# Altium PCB d21module.PcbDoc
Units mil, origin at the board's own origin, x right, y up, seen from the top; angles counter-clockwise.
Board outline 1775 x 1800 mil, 2 copper layers (Top Layer, Bottom Layer); 27 components, 60 nets, 180 pads, 93 vias.
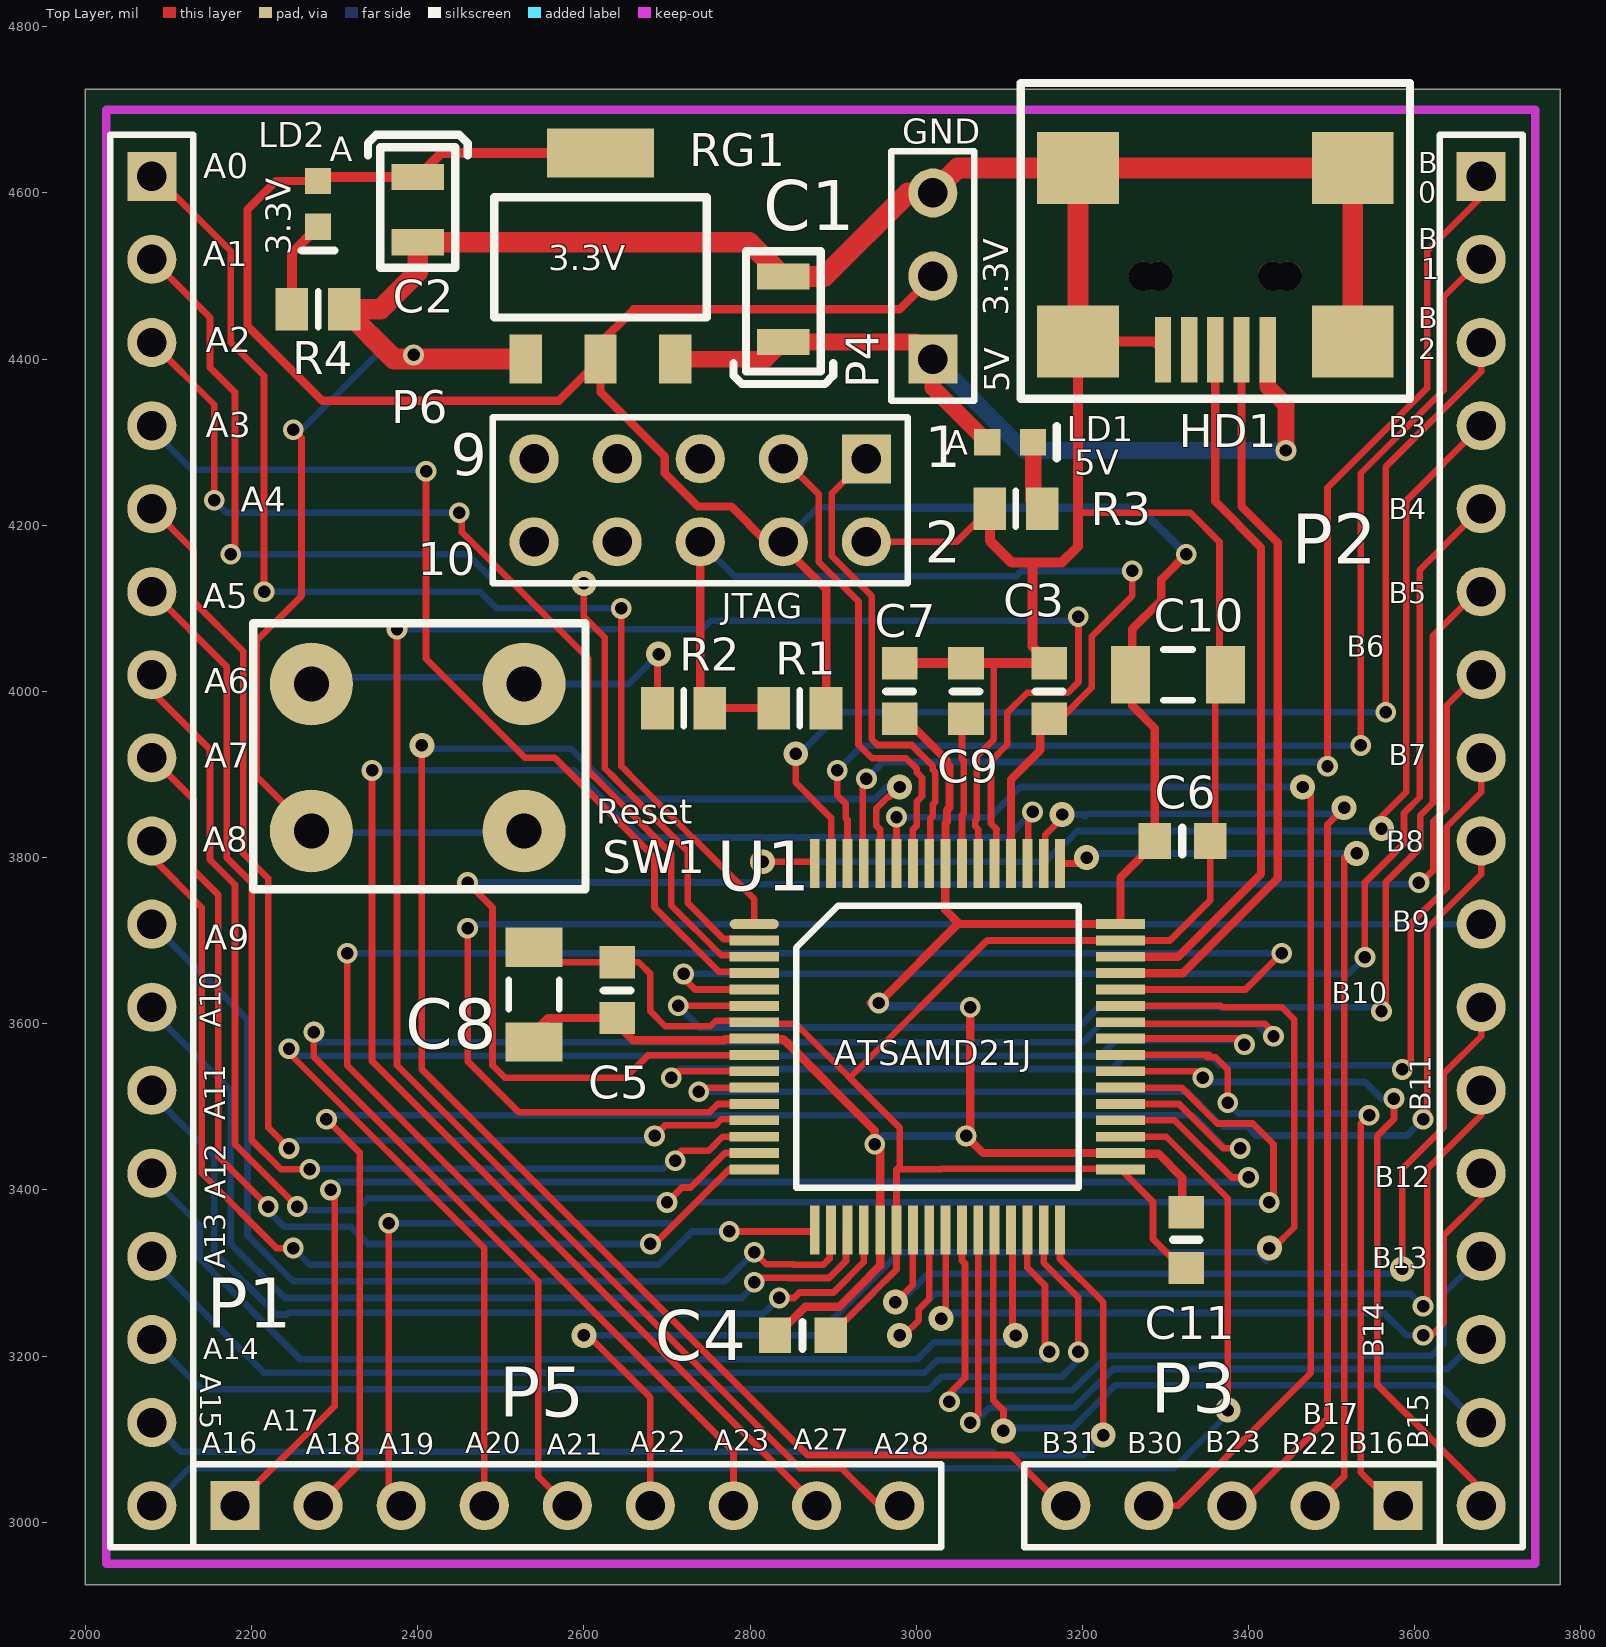
[diagram p0: Top Layer view]
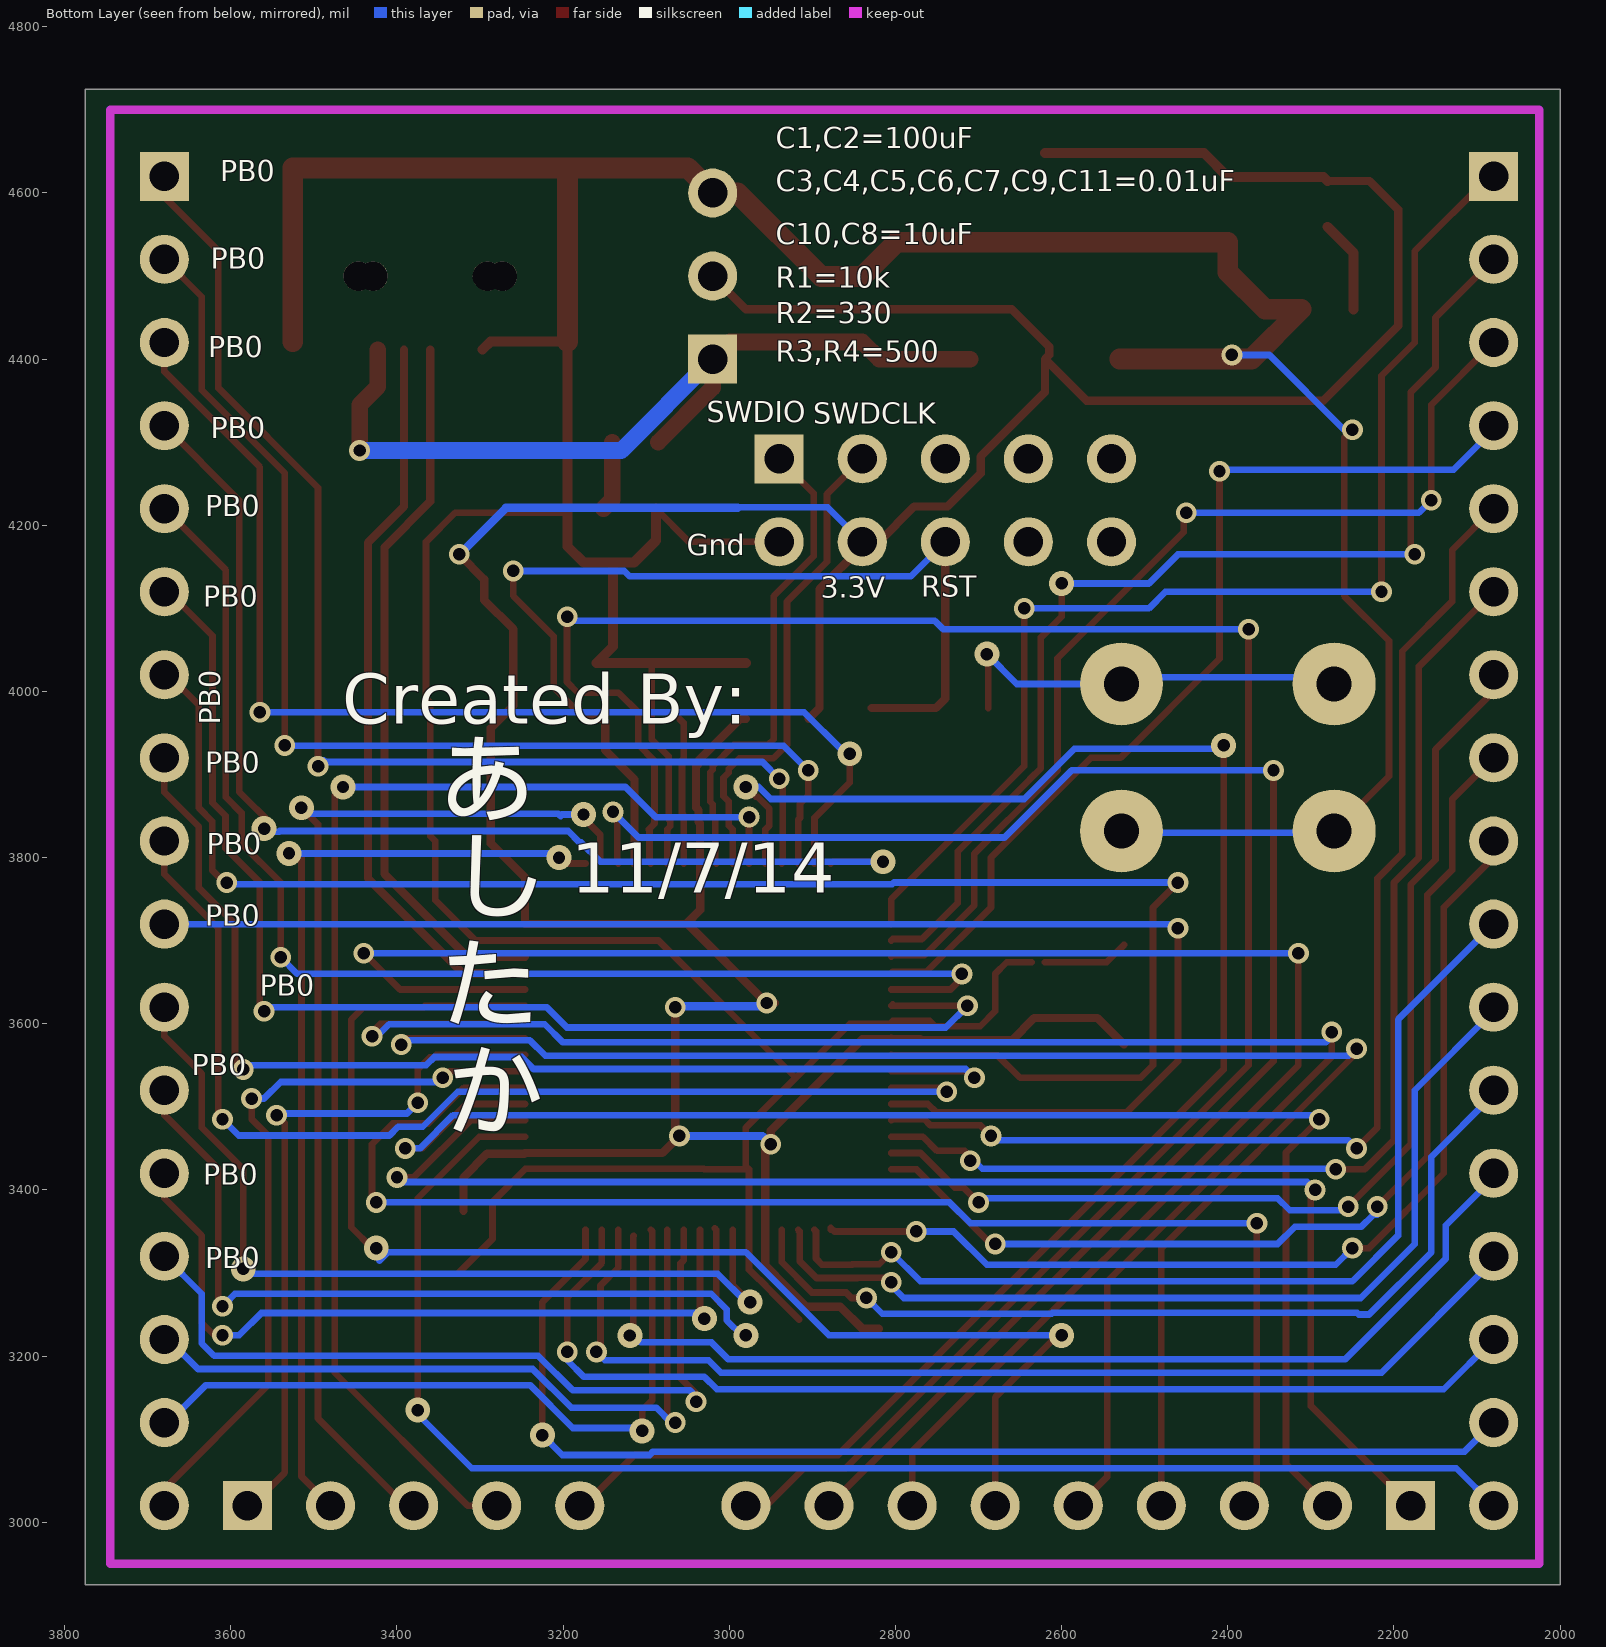
[diagram p1: Bottom Layer view, seen from below]

## Layer stack, top to bottom
Top Solder: solder mask 0.4, Solder Resist, Dk 3.5
Top Layer: signal copper 1.4
Dielectric1: dielectric 12.6, FR-4, Dk 4.8
Bottom Layer: signal copper 1.4
Bottom Solder: solder mask 0.4, Solder Resist, Dk 3.5

## Board outline
2000,2925 3775,2925 3775,4725 2000,4725

## Design rules (kind name [scope] priority, off if disabled: settings)
Clearance [All] p1: gap=8
HoleSize [All] p1: absolutevalues=TRUE maxlimit=250 minlimit=1 maxpercent=80.000 minpercent=20.000
PolygonConnect [All] p1: connectstyle=Relief reliefconductorwidth=10 reliefentries=4 polygonreliefangle="90 Angle" airgapwidth=10
RoomDefinition DevModule [InComponentClass('DevModule')] p1: confinementstyle=ConfineIn formatcopy=TRUE lockcomponents=FALSE outline 3795,3010 4540,3010 4540,3265 3795,3265
RoutingVias [All] p1: holewidth=16 width=25 viastyle="Through Hole" minholewidth=15 minwidth=25 maxholewidth=28 maxwidth=50
SilkToSilkClearance [All] p1: silktosilkclearance=1
SilkToSolderMaskClearance SilkscreenOverComponentPads [IsPad] p1: minsilkscreentomaskgap=10 clearancetoexposedcopper=TRUE
SolderMaskExpansion [All] p1: expansion=4
Width [All] p1: maxlimit=50 minlimit=8 preferedwidth=8
27 further rules are at their usual default settings.

## Components (designator, comment, footprint, x,y, rotation, side; value= is the part's Value field where it differs from the comment)
C1 "100UF_TANT_6.3V_0805" 100uF_6.3V_Tant_0805 2840,4460 r90 top
C2 "100UF_TANT_6.3V_0805" 100uF_6.3V_Tant_0805 2400,4580 r270 top
C3 "0.01UF_0603REFLOW" RC0603REFLOW-IPC 3160,4000 r90 top
C4 "0.01UF_0603REFLOW" RC0603REFLOW-IPC 2863,3225 r0 top
C5 "0.01UF_0603REFLOW" RC0603REFLOW-IPC 2640,3640 r90 top
C6 "0.01UF_0603REFLOW" RC0603REFLOW-IPC 3320,3820 r0 top
C7 "0.01UF_0603REFLOW" RC0603REFLOW-IPC 2980,4000 r90 top
C8 "10uF_Ceramic_6.3V" 1206_NP_CAP 2540,3635 r90 top
C9 "0.01UF_0603REFLOW" RC0603REFLOW-IPC 3060,4000 r90 top
C10 "10uF_Ceramic_6.3V" 1206_NP_CAP 3315,4020 r0 top
C11 "0.01UF_0603REFLOW" RC0603REFLOW-IPC 3325,3340 r270 top
HD1 "USB-MINI_B" HD_USB_MINI_B 3360,4500 r180 top locked
LD1 "0603_RED" LED0603REFLOW-IPC-COLOR 3120,4300 r90 top
LD2 "0603_RED" LED0603REFLOW-IPC-COLOR 2280,4580 r0 top
P1 "Header 17" HDR1X17 2080,4620 r270 top locked
P2 "Header 17" HDR1X17 3680,4620 r270 top locked
P3 "Header 5" HDR1X5 3580,3020 r180 top locked
P4 "Header 3" HDR1X3 3020,4400 r90 top
P5 "Header 9" HDR1X9 2180,3020 r0 top locked
P6 "Header 5X2" HDR2X5 2940,4280 r180 top
R1 "Res Semi" RESC2012L 2860,3980 r0 top
R2 "Res Semi" RESC2012L 2720,3980 r180 top
R3 "Res Semi" RESC2012L 3120,4220 r0 top
R4 "Res Semi" RESC2012L 2280,4460 r180 top
RG1 "LM1117SPX-3.3_SOT223" SOT223REFLOW 2620,4400 r0 top locked
SW1 "SW-PCB-4P-6MM" SW-PCB-4PIN 2400,3920 r0 top locked
U1 "ATSAMD21J" 64-TQFP 2805,3720 r0 top locked

## Footprints (in the part's own frame and the unit in brackets; to place one, negate y for a bottom-side part, rotate by r counter-clockwise, add the part's x,y. Pads: shape width x height; smd on the part's side, far side on the other; paste and mask are expansions set on the pad)
64-TQFP [mm]
  oval 1.5x0.3 smd: 1(0,0)
  rect 1.5x0.3 smd: 2(0,-0.5) 3(0,-1) 4(0,-1.5) 5(0,-2) 6(0,-2.5) 7(0,-3) 8(0,-3.5) 9(0,-4) 10(0,-4.5) 11(0,-5) 12(0,-5.5) 13(0,-6) 14(0,-6.5) 15(0,-7) 16(0,-7.5) 33(11.2,-7.5) 34(11.2,-7) 35(11.2,-6.5) 36(11.2,-6) 37(11.2,-5.5) 38(11.2,-5) 39(11.2,-4.5) 40(11.2,-4) 41(11.2,-3.5) 42(11.2,-3) 43(11.2,-2.5) 44(11.2,-2) 45(11.2,-1.5) 46(11.2,-1) 47(11.2,-0.5) 48(11.2,0)
  rect 0.3x1.5 smd: 17(1.85,-9.35) 18(2.35,-9.35) 19(2.85,-9.35) 20(3.35,-9.35) 21(3.85,-9.35) 22(4.35,-9.35) 23(4.85,-9.35) 24(5.35,-9.35) 25(5.85,-9.35) 26(6.35,-9.35) 27(6.85,-9.35) 28(7.35,-9.35) 29(7.85,-9.35) 30(8.35,-9.35) 31(8.85,-9.35) 32(9.35,-9.35) 49(9.35,1.85) 50(8.85,1.85) 51(8.35,1.85) 52(7.85,1.85) 53(7.35,1.85) 54(6.85,1.85) 55(6.35,1.85) 56(5.85,1.85) 57(5.35,1.85) 58(4.85,1.85) 59(4.35,1.85) 60(3.85,1.85) 61(3.35,1.85) 62(2.85,1.85) 63(2.35,1.85) 64(1.85,1.85)
  silkscreen extent 1.28,-8.06 9.91,0.57
100uF_6.3V_Tant_0805 [mm] "100uF 6.3V Tantalum 0805 package"
  rect 0.8x1.6 smd: 1(-1,0) 2(1,0)
  silkscreen extent -2.29,-1.52 1.78,1.52
1206_NP_CAP [mm] "Chip Capacitor, 2-Leads, Body 3.2x1.6mm, IPC Medium Density"
  rect 1.2x1.75 smd: 1(-1.45,0) 2(1.45,0)
  silkscreen extent -0.45,-0.77 0.45,0.77, body extent -1.6,-0.8 1.6,0.8, height 1.25
HD_USB_MINI_B [mm]
  rect 0.5x2 smd: 1(-1.6,2.25) 2(-0.8,2.25) 3(0,2.25) 4(0.8,2.25) 5(1.6,2.25)
  rect 2.5x2.2 smd: 6(-4.2,2) 7(4.2,2) 8(-4.2,-3.3) 9(4.2,-3.3)
  round 0.9 hole 0.9 unplated: 10(-1.75,0) 11(-2.2,0) 12(1.75,0) 13(2.2,0)
  Top Layer pour cut-out: -1.75,-0.45 -3.85,-0.45 -3.85,-6.5 3.85,-6.5 3.85,-0.45 1.75,-0.45 1.75,1.2 -1.75,1.2
  silkscreen extent -5.95,-5.9 5.95,3.75, body extent -5.35,-6.5 5.35,2.7, height 3.95
HDR1X3 [mm] "Connector; Header; 3 Position"
  rect 1.5x1.5 hole 0.9: 1(0,0)
  round 1.5 hole 0.9: 2(2.54,0) 3(5.08,0)
  silkscreen extent -1.27,-1.27 6.35,1.27
HDR1X5 [mm] "Connector; Header; 5 Position"
  rect 1.5x1.5 hole 0.9: 1(0,0)
  round 1.5 hole 0.9: 2(2.54,0) 3(5.08,0) 4(7.62,0) 5(10.16,0)
  silkscreen extent -1.27,-1.27 11.43,1.27
HDR1X9 [mm] "Connector; Header; 9 Position"
  rect 1.5x1.5 hole 0.9: 1(0,0)
  round 1.5 hole 0.9: 2(2.54,0) 3(5.08,0) 4(7.62,0) 5(10.16,0) 6(12.7,0) 7(15.24,0) 8(17.78,0) 9(20.32,0)
  silkscreen extent -1.27,-1.27 21.59,1.27
HDR1X17 [mm] "Connector; Header; 17 Position"
  rect 1.5x1.5 hole 0.9: 1(0,0)
  round 1.5 hole 0.9: 2(2.54,0) 3(5.08,0) 4(7.62,0) 5(10.16,0) 6(12.7,0) 7(15.24,0) 8(17.78,0) 9(20.32,0) 10(22.86,0) 11(25.4,0) 12(27.94,0) 13(30.48,0) 14(33.02,0) 15(35.56,0) 16(38.1,0) 17(40.64,0)
  silkscreen extent -1.27,-1.27 41.91,1.27
HDR2X5 [mm] "Connector; Header; 5x2 Position"
  rect 1.5x1.5 hole 0.9: 1(0,0)
  round 1.5 hole 0.9: 2(0,2.54) 3(2.54,0) 4(2.54,2.54) 5(5.08,0) 6(5.08,2.54) 7(7.62,0) 8(7.62,2.54) 9(10.16,0) 10(10.16,2.54)
  silkscreen extent -1.27,-1.27 11.43,3.81
LED0603REFLOW-IPC-COLOR [mm]
  rect 0.8x0.8 smd: 1(0,-0.525) 2(0,0.875)
  silkscreen extent -0.5,-1.25 0.5,-1.25
RC0603REFLOW-IPC [mil]
  rect 39x43 smd: 1(-33,0) 2(34,0)
  silkscreen extent 0,-16 0,16
RESC2012L [mm] "Chip Resistor, Body 2.0x1.3mm, IPC High Density"
  rect 1x1.3 smd: 1(-0.8,0) 2(0.8,0)
  silkscreen extent 0,-0.55 0,0.55, body extent -1.07,-0.7 1.07,0.7, height 2.54
SOT223REFLOW [mil]
  rect 39x59 smd: 1(-90,0) 2(0,0) 3(90,0)
  rect 129x59 smd: 4(0,248)
  silkscreen extent -128,50 128,195
SW-PCB-4PIN [mil]
  round 100 hole 42: 1(-128,-88) 2(128,-88) 3(128,89) 4(-128,89)
  silkscreen extent -198,-158 202,162

## Part data
C1 C2 C3 C4 C5 C6 C7 C9 C11: "Capacitor"
C8 C10: library part 18834, "Capacitor, 10uF, 6.3V, Ceramic, Y5V, -20%, +80%, Non-Polar, 1206, MURATA: GRM31MF50J106ZA01L or equivalent"
HD1: "Header"
LD1 LD2: "LED"
P1 P2: "Header, 17-Pin"
P3: "Header, 5-Pin"
P4: "Header, 3-Pin"
P5: "Header, 9-Pin"
P6: "Header, 5-Pin, Dual row"
R1 R2 R3 R4: "Semiconductor Resistor"
RG1: "Regulator"
SW1: "Switch"

## Via types
v1: diameter 25, hole 15, Top Layer to Bottom Layer, 71 vias
v2: diameter 30, hole 15, Top Layer to Bottom Layer, 22 vias

## Nets (pads, with @x,y where several pads share a name; then routed paths per layer and width w, separated by ;. In a path a pad name is that pad's centre, name@x,y a point inside that pad or via, vN(x,y) a via of type N, cw(c..) or ccw(c..) an arc to the next point about the centre after c; other vN are vias at no path point)
+3.3: C2.1 C4.1 C5.1 C6.1 C7.1 C8.1 C10.1 C11.1 LD2.2 P4.2 P6.4 R1.2 RG1.2 RG1.4 U1.8 U1.21 U1.34 U1.48 U1.56 | length 5284.4
  Top Layer w10: LD2.2 2229.45,4614.45 2195,4580 2195,4440 2285,4350 2570,4350 RG1.2 ; C8.1@2525,3575 2557,3607 2633,3607 2659.93,3580.07 2730.61,3580.07 2730.69,3580 2768.66,3580 2770.09,3581.43 2804.22,3581.43 U1.8 2805.78,3581.43 2839.91,3581.43 2950,3471.34 2950,3465 v1@2945,3460 ; C4.1@2820,3233 2840,3233 2866.5,3259.5 2907.62,3259.5 2931,3282.88 2931,3283.23 2956.57,3308.8 U1.21 v1@2956.57,3450 ; R1.2@2904.5,3967 R1.2 2891.5,4123.11 2840,4174.6 P6.4 2820,4180 2777.47,4222.53 2737.33,4222.53 2697.47,4262.38 2697.47,4282.67 2620,4360.14 RG1.2 ; v1@2945,3625 v1(2955,3625) 3050.98,3720.98 ; C7.1 2986.99,3967 3037,3916.99 3037,3912.85 3040,3909.85 3040,3860.15 3037,3857.15 3037,3843.01 3035.31,3841.32 U1.56 3035,3792.52 3035,3736.97 3050.98,3720.98 ; P4.2 2980,4460 2660,4460 2615,4415 2615,4405 RG1.2 ; v1(3065,3620) 3065,3470 v1(3060,3465) 3080.59,3444.41 U1.34 3246.72,3443.63 3291.37,3443.63 3320,3415 C11.1@3320,3375 ; v1(3325,4165) 3295,4135 3295,4110 3260,4075 3260,3982.91 3287,3955.91 3287,3817 3245.94,3775.94 U1.48 3051.97,3720 3050.98,3720.98
  Top Layer w12: LD2.2 2284.92,4619.37 C2.1 2428.63,4648 RG1.4
  Bottom Layer w8: P6.4 2881.53,4221.53 2989.47,4221.53 2990,4221
  Bottom Layer w10: v1(2950,3455) 2960,3465 v1(3060,3465) ; v1@2964,3621 3066,3621 v1(3065,3620) ; 2990,4221 3269,4221 v1(3325,4165)
+5: C1.1 HD1.1 LD1.2 P4.1 RG1.3 | length 1055.3
  Top Layer w20: RG1.3 2819.37,4400 C1.1 2999.37,4420.63 P4.1 3020,4365.55 LD1.2 ; HD1.1 3422.99,4367.01 3445,4345 v1(3445,4290)
  Bottom Layer w20: P4.1 3130,4290 v1(3445,4290)
D+: HD1.3 U1.46 | length 864.1
  Top Layer w10: U1.46 3315.17,3680.63 3415,3780.46 3415,4173.54 3360,4228.54 HD1.3
D-: HD1.2 U1.45 | length 890.7
  Top Layer w10: U1.45 3320.95,3660.95 3435,3775 3435,4179 3391.5,4222.5 HD1.2
GND: C1.2 C2.2 C3.2 C4.2 C5.2 C6.2 C7.2 C8.2 C9.2 C10.2 C11.2 HD1.5 HD1.6 HD1.7 HD1.8 HD1.9 P4.3 P6.2 R3.1 R4.1 RG1.1 SW1.1 SW1.2 U1.7 U1.22 U1.33 U1.47 U1.54 | length 6608.4
  Top Layer w8: v1@2252,4313 2260,4305 2260,4115 2206,4061 2206,3898 SW1.1 ; C8.2@2525,3695 2546,3674 C5.2@2620,3674 ; C5.2@2636,3674 2666,3674 2680,3660 2680,3615 2697.93,3597.07 2752.07,3597.07 2758.67,3603.67 2803.22,3603.67 U1.7 2806.78,3600.11 2854.89,3600.11 2980,3475 2980,3428.19 2976.53,3424.72 3030.18,3424.72 3030.87,3425.42 3245.25,3425.42 3285,3385.67 3285,3341 C11.2@3326,3300 ; C4.2@2916.16,3244 2948,3275.84 2948,3276.18 2963.82,3292 2964.16,3292 2976.26,3304.1 U1.22 2976.26,3425 ; 2920,3535 3085.32,3700.32 U1.47 3305.32,3700.32 3354,3749 C6.2 3360,3826 3360,3987.09 3365,3992.09 3365,4180 3330,4215 3194.65,4215 ; P6.2 3048.5,4180 R3.1 ; U1.54 3074.68,3834.02 3071,3837.71 3071,3844.48 3073,3846.48 3073,3922.03 3093.5,3942.53 3093.5,4032.5 3095,4034
  Top Layer w12: C7.2 C9.2 3095,4034 C3.2 3140,4054 3140,4155 ; R3.1 3088.5,4181.5 3115,4155 3140,4155 ; HD1.5 3287.17,4421.26 HD1.7 3194.65,4215 3194.65,4174.65 3175,4155 3140,4155
  Top Layer w25: RG1.1 2371.5,4400 R4.1 2355,4460 2400,4505 C2.2 2798.74,4540.63 C1.2 2889.37,4499.37 2990,4600 P4.3 3049.92,4629.92 HD1.9 ; HD1.7 HD1.9 ; HD1.6 HD1.8 HD1.9
  Bottom Layer w8: v1(2250,4315) 2260,4315 2350,4405 v1(2395,4405) ; SW1.1 2274,3830 2526,3830 SW1.2
NetC9_1: C9.1 U1.55 | length 177.9
  Top Layer w8: U1.55 3055,3836.96 3055,3851.11 3057,3853.11 3057,3916.89 3055,3918.89 3055,3962 C9.1
NetLD1_1: LD1.1 R3.2 | length 84.5
  Top Layer w20: LD1.1 3140.67,4230.83 R3.2
NetLD2_1: LD2.1 R4.2 | length 112.4
  Top Layer w12: R4.2 2248.5,4527.83 LD2.1
NetP1_1: P1.1 U1.1 | length 1438.4
  Top Layer w8: P1.1 2085,4620 2175,4530 2175,4420 2215,4380 v1(2215,4120) ; v1@2645,4095 2645,3910.25 2654,3901.25 2654,3901 2805,3750 U1.1
  Bottom Layer w8: v1(2215,4120) 2475,4120 2495,4100 v1(2645,4100)
NetP1_2: P1.2 U1.2 | length 1368.1
  Top Layer w8: P1.2 2150,4450 2150,4390 2180,4360 2180,4170 v1(2175,4165) ; v2(2600,4130) 2600,4090 2625,4065 2625,3907.63 2638,3894.63 2638,3894.37 2725,3807.37 2725,3745.25 2768.16,3702.09 2803.22,3702.09 U1.2
  Bottom Layer w8: v1(2175,4165) 2460,4165 2495,4130 v2@2595,4130
NetP1_3: P1.3 U1.3 | length 1226.5
  Top Layer w8: P1.3 2155,4345 v1(2155,4230) ; v1(2450,4215) 2451,4215 2453,4213 2453,4192 2605,4040 2605,3905 2622,3888 2622,3887.75 2705,3804.75 2705,3742.63 2765.22,3682.41 2803.22,3682.41 U1.3
  Bottom Layer w8: v1(2155,4230) 2170,4215 v1(2450,4215)
NetP1_4: P1.4 U1.4 | length 1168.3
  Top Layer w8: v1(2410,4265) 2410,4039.32 2529.32,3920 2565,3920 2685,3800 2685,3740 2762.28,3662.72 2803.22,3662.72 U1.4
  Bottom Layer w8: P1.4 2080,4315 2128,4267 2408,4267 v1(2410,4265)
NetP1_5: P1.5 U1.13 | length 1414.1
  Top Layer w8: P1.5 2130,4170 2130,4108.3 2190,4048.3 2190,3805 2220,3775 2220,3475 v1(2245,3450) ; v1@2688,3463 2688,3468 2697.65,3477.65 2757.9,3477.65 2765.25,3485 2803.78,3485 U1.13
  Bottom Layer w8: v1(2245,3450) 2255,3460 2680,3460 v1(2685,3465)
NetP1_6: P1.6 U1.14 | length 1355.4
  Top Layer w8: P1.6 2170,4030 2170,3800 2200,3770 2200,3460 2235,3425 v1(2270,3425) ; v1(2710,3435) 2710,3440 2717,3447 2749.88,3447 2766.98,3464.09 U1.14
  Bottom Layer w8: v1(2270,3425) 2270.5,3425.5 2695.5,3425.5 2710,3440 v1(2710,3435)
NetP1_7: P1.7 U1.15 | length 1312
  Top Layer w8: P1.7@2085,4020 P1.7 2080,4000 2150,3930 2150,3797.37 2180,3767.37 2180,3455 v1(2255,3380) ; v1(2700,3385) 2718,3403 2728.51,3403 2769.92,3444.41 U1.15
  Bottom Layer w8: P1.7@2080,4010 P1.7 ; v1(2255,3380) 2259.5,3375.5 2325.5,3375.5 2340,3390 2695,3390 v1(2700,3385)
NetP1_8: P1.8 U1.16 | length 1234.7
  Top Layer w8: P1.8 2130,3870 2130,3785 2160,3755 2160,3440 v1(2220,3380) ; v1@2685,3335 2774.72,3424.72 U1.16
  Bottom Layer w8: P1.8 P1.8@2085,3920 ; v1@2220,3370 2225,3370 2239.5,3355.5 2319.5,3355.5 2340,3335 v1(2680,3335)
NetP1_9: P1.9 U1.17 | length 1234.3
  Top Layer w8: P1.9 2080,3800 2140,3740 2140,3420 2230,3330 v1(2250,3330) ; v1(2775,3350) 2873.34,3350 2877.83,3354.49 U1.17
  Bottom Layer w8: P1.9 P1.9@2085,3820 ; v1(2250,3330) 2270,3310 2690,3310 2730,3350 v1(2775,3350)
NetP1_10: P1.10 U1.18 | length 1221.3
  Top Layer w8: P1.10 P1.10@2092.58,3720 ; v1@2802.5,3327.5 2819.5,3310.5 2851.78,3310.5 2852.28,3310 2888.35,3310 2895.74,3317.39 2895.74,3350.11 U1.18
  Bottom Layer w8: P1.10 2195,3605 2195,3345 2250,3290 2770,3290 v1(2805,3325)
NetP1_11: P1.11 U1.19 | length 1151.5
  Top Layer w8: v1(2805,3289) 2811,3295 2812.37,3295 2812.87,3294.5 2845.15,3294.5 2845.65,3294 2894.98,3294 2915.43,3314.45 2915.43,3350.11 U1.19
  Bottom Layer w8: P1.11 2080,3615 2175,3520 2175,3335 2240,3270 2790,3270 2805,3285 v1(2805,3289)
NetP1_12: P1.12 U1.20 | length 1104.9
  Top Layer w8: v1(2835,3270) 2852.96,3270 2859.46,3276.5 2900.58,3276.5 2902.08,3278 2902.08,3278.35 2936.89,3313.16 U1.20
  Bottom Layer w8: P1.12 2080,3515 2155,3440 2155,3325 2230,3250 2242.37,3250 2244.37,3252 2611.18,3252 2612.18,3251 2816,3251 v1(2835,3270)
NetP1_13: P1.13 U1.29 | length 1300.1
  Top Layer w8: U1.29@3115,3345 3115.83,3344.17 3115.83,3228.55 v2(3119.59,3224.79)
  Bottom Layer w8: P1.13 2087,3413 2087,3408 2137.53,3357.47 2137.53,3317.47 2259,3196 3001,3196 3021.5,3216.5 3106.5,3216.5 3114.5,3224.5 3114.5,3225 3119.59,3219.91 v2(3119.59,3224.79)
NetP1_14: P1.14 U1.30 | length 1309
  Top Layer w8: U1.30 3133.74,3306.26 3155,3285 3155,3210 v1(3160,3205)
  Bottom Layer w8: P1.14 2080,3315 2215,3180 3010,3180 3025,3195 3150,3195 v1(3160,3205)
NetP1_15: P1.15 U1.31 | length 1328.5
  Top Layer w8: U1.31 3153.42,3312.14 3195,3270.57 v1(3195,3205)
  Bottom Layer w8: P1.15 2140,3160 3015,3160 3030,3175 3175,3175 3195,3195 v1(3195,3205)
NetP1_16: P1.16 U1.32 | length 1439.5
  Top Layer w8: U1.32 3173.11,3316.89 3225,3265 v2(3225,3105)
  Bottom Layer w8: P1.16 2115,3085 3091.82,3085 3095.82,3081 3201,3081 v2(3225,3105)
NetP1_17: P1.17 U1.35 | length 1785.3
  Top Layer w8: P1.17 P1.17@2080,3045 ; U1.35 3300.91,3464.09 3375,3390 v2(3375,3135)
  Bottom Layer w8: P1.17 2125,3065 3310,3065 3375,3130 v2(3375,3135)
NetP2_1: P2.1 U1.61 | length 1448.1
  Top Layer w8: U1.61 2935.76,3793.96 2935.76,3890.76 v1(2940,3895) ; v1(3495,3910) 3495,4245.25 3615,4365.25 3615,4530 3680,4595 P2.1
  Bottom Layer w8: v1(2940,3895) 2960,3915 3486,3915 v1@3488,3917
NetP2_2: P2.2 U1.62 | length 1404.7
  Top Layer w8: v1(2905,3905) 2905,3875 2915,3865 2915,3847.67 2917.2,3845.46 U1.62 ; v1(3535,3935) 3535,4262.63 3635,4362.63 3635,4475 P2.2
  Bottom Layer w8: v1(2905,3905) 2934.5,3934.5 3534.5,3934.5 v1(3535,3935)
NetP2_3: P2.3 U1.63 | length 1385.2
  Top Layer w8: v2(2855,3925) 2855,3890.35 2897.52,3847.83 U1.63 ; v1@3570,3975 3565,3980 3565,4270 3680,4385 P2.3
  Bottom Layer w8: v2(2855,3925) 2850,3930 2865,3930 2910,3975 v1(3565,3975)
NetP2_4: P2.4 U1.64 | length 1378.9
  Top Layer w8: v2(2815,3795) 2875.67,3795 U1.64 ; v2(3560,3835) 3560,3830.76 3559.24,3830 3550,3839.24 3590,3879.24 3590,4230 P2.4
  Bottom Layer w8: v2(2815,3795) 3155,3795 3178.36,3818.36 3180.18,3818.36 3193.82,3832 3541.18,3832 3541.95,3831.23 3556.23,3831.23 v2(3560,3835)
NetP2_5: P2.5 U1.5 | length 1547.4
  Top Layer w8: v1(2720,3660) 2720,3655 2733.74,3641.26 U1.5 ; v1(3540,3680) 3540,3770 3587,3817 3587,3853.61 3606,3872.61 3606,4146 P2.5
  Bottom Layer w8: v1(2720,3660) 3520,3660 v1(3540,3680) ; P2.5@3662,4238 P2.5
NetP2_6: P2.6 U1.6 | length 1519.3
  Top Layer w8: v1(2713.43,3621.57) U1.6 U1.6@2803.22,3623.35 ; v1@3565,3615 3565,3770 3606.47,3811.47 3606.47,3850.46 3622,3865.98 3622,4067 3675,4120 P2.6
  Bottom Layer w8: v1(2713.43,3621.57) 2739.5,3595.5 3195.5,3595.5 3220,3620 3555,3620 v1(3560,3615)
NetP2_7: P2.7 U1.9 | length 2008.2
  Top Layer w8: v1(2460,3770) 2490,3740 2490,3550 2505,3535 2650,3535 2677,3562 2804.48,3562 U1.9 ; v1(3605,3770) 3610,3770 3608.74,3771.26 3622.47,3785 3622.47,3843.83 3638.47,3859.83 3638.47,3983.47 3675,4020 P2.7
  Bottom Layer w8: v1(2460,3770) 2466,3764 2466,3770 2801.82,3770 2803.82,3768 3603,3768 v1(3605,3770)
NetP2_8: P2.8 U1.10 | length 1408.8
  Top Layer w8: v1@2707.16,3542.84 U1.10 ; v1(3585,3545) 3595,3555 3595,3720 3638.47,3763.47 3638.47,3837.2 3680,3878.73 P2.8
  Bottom Layer w8: v1(2705,3535) 2715.62,3545.62 3235.62,3545.62 3250,3560 3355,3560 3365,3550 3580,3550 v1(3585,3545)
NetP2_9: P2.9 U1.11 | length 1337.6
  Top Layer w8: v1(2738.15,3518.15) 2738.15,3523.15 U1.11 ; v1(3610,3485) 3615,3490 3615,3715 3680,3780 P2.9
  Bottom Layer w8: v1(2738.15,3518.15) 3326.85,3518.15 3369,3476 3398.65,3476 3409.15,3465.5 3590.5,3465.5 v1(3610,3485)
NetP2_10: P2.10 U1.12 | length 1754.5
  Top Layer w8: v1(2460,3715) 2460,3555 2521.35,3493.65 2751.28,3493.65 2761.09,3503.47 U1.12
  Bottom Layer w8: v1@2460,3720 P2.10
NetP2_11: P2.11 U1.23 | length 1093.5
  Top Layer w8: v2(2975,3265) 2995.94,3285.94 U1.23 ; v2@3590,3295 3585,3300 3585,3425 3635,3475 3635,3540 3680,3585 P2.11
  Bottom Layer w8: v2(2975,3265) 2980,3265 3014,3299 3586,3299 3585,3300 v2(3585,3305)
NetP2_12: P2.12 U1.24 | length 1102.8
  Top Layer w8: v2(2980,3225) 2985,3225 3003,3243 3003,3256.18 3015.63,3268.81 U1.24 U1.24@3017.41,3353.67 ; v1@3615,3264 3615,3425 3680,3490 P2.12
  Bottom Layer w8: v2(2980,3225) 2985,3225 3003,3243 3003,3256.18 3021.82,3275 3595,3275 3605.91,3264.09 3605.91,3255.91 v1(3610,3260)
NetP2_13: P2.13 U1.25 | length 956.9
  Top Layer w8: v2(3030,3245) 3030,3240.63 3035.31,3235.31 U1.25 ; v1@3610,3220.35 v1(3610,3225) 3620,3225 3635,3240 3635,3345 3680,3390 P2.13
  Bottom Layer w8: v2(3030,3245) 3036.79,3251.79 3563.21,3251.79 3590,3225 v1(3610,3225)
NetP2_14: P2.14 U1.26 | length 958.9
  Top Layer w8: v1@3038.75,3153.75 3058.68,3173.68 3058.68,3311.57 3055,3315.25 U1.26
  Bottom Layer w8: v1(3040,3145) 3040,3151 3048,3159 3188.65,3159 3230.15,3200.5 3620.15,3200.5 3635,3215.35 3635,3275 P2.14
NetP2_15: P2.15 U1.27 | length 892.3
  Top Layer w8: v1(3065,3120) 3074.68,3129.68 U1.27
  Bottom Layer w8: v1(3065,3120) 3070,3120 3088,3138 3190.28,3138 3236.78,3184.5 3639.5,3184.5 3675,3220 P2.15
NetP2_16: P2.16 U1.28 | length 858.7
  Top Layer w8: U1.28 3092.59,3350.11 3092.59,3235.77 3092.59,3147.06 3105,3134.65 v2(3105,3110)
  Bottom Layer w8: v2@3109,3113.5 3188.4,3113.5 3239.9,3165 3630,3165 3675,3120 P2.16
NetP2_17: P2.17 U1.39 | length 881.6
  Top Layer w8: U1.39 v1@3337.16,3542.84 ; v1(3575,3510) 3575,3485.35 3555,3465.35 3555,3165 3680,3040 P2.17
  Bottom Layer w8: v1(3345,3535) 3350,3530 3540,3530 3560,3510 v1(3575,3510)
NetP5_1: P5.1 U1.36 | length 1725.5
  Top Layer w8: P5.1 2300,3140 2300,3395 v1(2295,3400) ; U1.36 3311.22,3483.78 3380,3415 v1(3400,3415)
  Bottom Layer w8: v1(2295,3400) 2304.5,3409.5 3394.5,3409.5 v1(3400,3415)
NetP5_2: P5.2 U1.37 | length 1790
  Top Layer w8: P5.2 2330,3070 2330,3445 v1(2290,3485) ; U1.37 3316.28,3503.47 3369.75,3450 v1(3390,3450)
  Bottom Layer w8: v1(2290,3485) 2290,3490 3332.37,3490 3372.37,3450 v1(3390,3450)
NetP5_3: P5.3 U1.38 | length 1700.9
  Top Layer w8: v1(2365,3360) 2365,3035 P5.3 ; U1.38 3319.22,3523.15 3362.37,3480 3405,3480 3430,3455 3430,3390 v1(3425,3385)
  Bottom Layer w8: v1(2365,3360) 2710,3360 2735,3385 v1(3425,3385)
NetP5_4: P5.4 U1.41 | length 1967.5
  Top Layer w8: v1@2246,3569 2246,3564 2480,3330 P5.4 ; U1.41@3246.15,3582 U1.41 3387.8,3582.2 v1(3395,3575)
  Bottom Layer w8: v1@2241.02,3575 2254.4,3561.62 3221.62,3561.62 3240,3580 3390,3580 v1(3395,3575)
  other v1: 2245,3570
NetP5_5: P5.5 U1.42 | length 2044.2
  Top Layer w8: v1(2275,3590) 2275,3585 2275,3560 2545,3290 2545,3055 P5.5 ; U1.42 U1.42@3247.05,3603 ; U1.42@3265,3600.11 3419.89,3600.11 3430,3590 v1(3430,3585)
  Bottom Layer w8: v1(2275,3590) 2275,3585 2282.38,3577.62 3200.25,3577.62 3222.13,3599.5 3409.5,3599.5 v1@3424,3585
NetP5_6: P5.6 U1.43 | length 1616
  Top Layer w8: v2(2600,3225) 2602.5,3227.5 2680,3150 P5.6 ; U1.43 3366.57,3621.57 3368.15,3620 3440,3620 3455,3605 3455,3355 3430,3330 v2(3425,3330)
  Bottom Layer w8: v2(2600,3225) 2880,3225 2980,3325 3411,3325 3421,3315
NetP5_7: P5.7 U1.44 | length 2232.4
  Top Layer w8: v1(2315,3685) 2315,3550 2780,3085 2780,3036.94 2763.06,3020 P5.7 ; U1.44 3396.26,3641.26 3435,3680 3440,3680 v1(3440,3685)
  Bottom Layer w8: v1(2315,3685) 3431,3685 3439,3677 3440,3678 v1(3440,3685)
NetR2_2: R2.2 SW1.3 SW1.4 | length 504.5
  Top Layer w8: R2.2 v2@2688.5,4045
  Bottom Layer w8: SW1.4 2280,4017 2520,4017 SW1.3 2654,4009 v2(2690,4045)
NRESET: C3.1 P6.6 R1.1 R2.1 U1.52 | length 1246.9
  Top Layer w8: C3.1 3173.6,3967 3211.29,4004.69 3211.29,4066.29 3260,4115 v1(3260,4145)
  Top Layer w10: P6.6 2740,3991.5 R2.1 R1.1 ; U1.52 3114.05,3894.05 3149.44,3929.44 3149.44,3964.44 3152,3967 C3.1
  Bottom Layer w8: P6.6 2781.53,4138.47 3119.89,4138.47 3126.42,4145 v1(3260,4145)
PA27: P5.8 U1.51 | length 2012.6
  Top Layer w8: v1(2345,3905) 2340,3905 2345,3900 2345,3555 P5.8 ; U1.51 3135,3794.09 v1@3135,3845 ; v1(3140,3855) v1@3140,3860
  Bottom Layer w8: v1(2345,3905) 2587.94,3905 2668.7,3824.24 3109.24,3824.24 v1(3140,3855)
PA28: P5.9 U1.53 | length 2554.1
  Top Layer w8: v1(2375,4075) 2375,3550 2860,3065 2910,3065 2955,3020 P5.9 ; U1.53 3096.15,3794.61 3096.15,3832.86 ; 3097.05,3833.76 3090.68,3840.13 3090.68,3840.65 3090,3841.33 3090,3916.4 3109.5,3935.9 ; 3109.5,3942.53 3109.5,3935.9 ; v1@3195.29,4086.01 3195.29,4011.32 3182.47,3998.5 3133.53,3998.5 3109.5,3974.47 3109.5,3935.9
  Bottom Layer w8: v1(2375,4075) 2742.63,4075 2752.63,4085 3190,4085 v1@3197.5,4092.5
  other v1: 3195,4090
PB17: P3.1 U1.40 | length 849.7
  Top Layer w8: U1.40 3352.48,3562.52 ; 3350,3560 3350.5,3559.5 3360.5,3559.5 3375,3545 v1(3375,3505) ; v1(3545,3490) 3535,3480 3535,3060 3575,3020 P3.1
  Bottom Layer w8: v1(3375,3505) 3388,3492 3543,3492 v1(3545,3490)
PB22: P3.2 U1.49 | length 1184.6
  Top Layer w8: U1.49 3192.83,3792.83 3200,3800 v2(3205,3800) ; P3.2 3515,3055 3515,3800 3518.81,3803.81 3522.63,3800 3527.63,3805 v2(3530,3805)
  Bottom Layer w8: v2@3200,3805 v2@3525,3805 ; v2(3205,3800) v2@3205,3810
PB23: P3.3 U1.50 | length 1313.8
  Top Layer w8: U1.50@3155,3795 3155.2,3795.2 3155.2,3827.33 3177.87,3850 3176,3851.87 v2(3175.5,3851.87) ; P3.3 3390,3020 3495,3125 3495,3840 v2(3515,3860)
  Bottom Layer w8: v2(3175.5,3851.87) 3201.23,3851.87 3203.1,3850 3206.1,3853 3508,3853 v2(3515,3860)
PB30: P3.4 U1.59 | length 1530.1
  Top Layer w8: U1.59 v1(2976.26,3848.74) ; P3.4 3315,3020 3475,3180 3475,3875 v2(3465,3885)
  Bottom Layer w8: v1(2976.26,3848.74) 3088.74,3848.74 3125,3885 v2(3465,3885)
PB31: P3.5 U1.60 | length 2107.7
  Top Layer w8: v2@2405,3922 2405,3545 2869,3081 3114,3081 3166,3029 3166,3006 P3.5 ; U1.60 2956.57,3833.78 2951.76,3838.59 2951.76,3858.89 2966.11,3873.24 2968.24,3873.24 v2(2980,3885)
  Bottom Layer w8: v2@2405,3931 2584.56,3931 2645.06,3870.5 2950.15,3870.5 2964.65,3885 v2(2980,3885)
  other v2: 2405,3935
SWDCLK: P6.1 U1.57 | length 583
  Top Layer w8: P6.1 2898.47,4238.47 2898.47,4162.8 2946.5,4114.77 2946.5,3942.53 2953.53,3935.5 2994.45,3935.5 3020,3909.95 3020,3905.81 3023,3902.81 3023,3867.19 3020,3864.19 3020,3850.05 3016.76,3846.81 3016.76,3793.96 U1.57
SWDIO: P6.3 U1.58 | length 584.9
  Top Layer w8: P6.3 2882.47,4237.53 2882.47,4156.17 2930.5,4108.14 2930.5,3935.9 2946.9,3919.5 2987.83,3919.5 3000.76,3906.57 3000.76,3902.42 3007,3896.18 3007,3873.82 3000.76,3867.58 3000.76,3838.59 2995.94,3833.78 U1.58
pads on no net: HD1.4 HD1.10 HD1.11 HD1.12 HD1.13 P6.5 P6.7 P6.8 P6.9 P6.10

## Keep-outs
Keep-Out Layer:
  lines w10: 2025,2950 2025,4700 3745,4700 3745,2950 2025,2950

## Silkscreen, mask and mechanical layers (free items; w line width, h text height)
Top Overlay:
  text "GND" at 2983,4659 h30
  text "B" at 3604,4624 h25
  text "A0" at 2142,4618 h30
  text "0" at 3604,4588 h25
  text "B" at 3604,4532 h25
  text "3.3V" at 2247,4525 h30 r90
  text "A1" at 2141,4512 h30
  text "3.3V" at 2557,4507 h30
  text "1" at 3608,4496 h25
  text "3.3V" at 3111,4452 h30 r90
  text "B" at 3604,4437 h25
  text "A2" at 2145,4408 h30
  text "2" at 3604,4400 h25
  text "5V" at 3112,4360 h30 r90
  text "A3" at 2145,4306 h30
  text "B3" at 3569,4306 h25
  text "5V" at 3190,4261 h30
  text "A4" at 2187,4216 h30
  text "B4" at 3569,4207 h25
  text "B5" at 3569,4106 h25
  text "A5" at 2141,4100 h30
  text "JTAG" at 2766,4088 h30
  text "B6" at 3518,4042 h25
  text "A6" at 2143,3998 h30
  text "B7" at 3569,3911 h25
  text "A7" at 2143,3908 h30
  text "Reset" at 2615,3841 h30
  text "A8" at 2141,3807 h30
  text "B8" at 3566,3807 h25
  text "B9" at 3573,3711 h25
  text "A9" at 2143,3689 h30
  text "B10" at 3500,3625 h25
  text "A10" at 2163,3595 h25 r90
  text "ATSAMD21J" at 2901,3550 h30
  text "B11" at 3619,3495 h25 r90
  text "A11" at 2168,3484 h25 r90
  text "B12" at 3552,3403 h25
  text "A12" at 2169,3389 h25 r90
  text "B13" at 3549,3306 h25
  text "A13" at 2168,3305 h25 r90
  text "B14" at 3563,3198 h25 r90
  text "A14" at 2142,3196 h25
  text "A15" at 2138,3179 h25 r270
  text "B17" at 3465,3118 h25
  text "A17" at 2214,3110 h25
  text "B15" at 3616,3088 h25 r90
  text "A27" at 2852,3087 h25
  text "A23" at 2756,3086 h25
  text "A22" at 2656,3084 h25
  text "B23" at 3348,3084 h25
  text "A16" at 2140,3083 h25
  text "A20" at 2457,3083 h25
  text "B31" at 3151,3083 h25
  text "B30" at 3254,3083 h25
  text "B16" at 3520,3083 h25
  text "A18" at 2265,3082 h25
  text "A19" at 2353,3082 h25
  text "A28" at 2949,3082 h25
  text "B22" at 3440,3082 h25
  text "A21" at 2555,3081 h25
Bottom Overlay:
  text "C1,C2=100uF" at 2944,4654 h25
  text "PB0" at 3613,4614 h25
  text "C3,C4,C5,C6,C7,C9,C11=0.01uF" at 2944,4602 h25
  text "C10,C8=10uF" at 2944,4538 h25
  text "PB0" at 3624,4509 h25
  text "R1=10k" at 2944,4486 h25
  text "R2=330" at 2944,4443 h25
  text "PB0" at 3627,4402 h25
  text "R3,R4=500" at 2944,4397 h25
  text "SWDIO" at 3027,4324 h25
  text "SWDCLK" at 2899,4322 h25
  text "PB0" at 3624,4305 h25
  text "PB0" at 3631,4211 h25
  text "Gnd" at 3051,4164 h25
  text "RST" at 2769,4114 h25
  text "3.3V" at 2890,4113 h25
  text "PB0" at 3633,4102 h25
  text "Created By:" at 3466,3961 h60
  text "PB0" at 3613,3960 h25 r270
  text "PB0" at 3631,3902 h25
  text "あ" at 3351,3823 h150
  text "PB0" at 3629,3804 h25
  text "11/7/14" at 3190,3758 h60
  text "PB0" at 3631,3718 h25
  text "し" at 3341,3705 h150
  text "PB0" at 3565,3634 h25
  text "た" at 3348,3577 h150
  text "PB0" at 3647,3538 h25
  text "か" at 3343,3449 h150
  text "PB0" at 3633,3406 h25
  text "PB0" at 3631,3306 h25
Drill Drawing:
  text ".LEGEND" at 3850,3140 h60
  text "Drill Drawing." at 3820,3035 h60

## Dimensions
2025,2950 to 2025,4700 on Mechanical 1
2025,2950 to 3745,2950 on Mechanical 1

## Text inside footprints (layer, text, board x,y; h text height)
LD1: Top Overlay "A" at 3035,4285 h29.53
LD2: Top Overlay "A" at 2294,4638 h29.53
P6: Top Overlay "10" at 2400,4140 h40; Top Overlay "9" at 2440,4260 h50; Top Overlay "1" at 3010,4270 h50; Top Overlay "2" at 3010,4155 h50